# Altium PCB PCB1.PcbDoc
Units mm, origin at the board's own origin, x right, y up, seen from the top; angles counter-clockwise.
Board outline 200.25 x 200.25 mm, 2 copper layers (Top Layer, Bottom Layer); 20 components, 18 nets, 746 pads, 0 vias.
Unrouted connection lines stored in the file: 26.
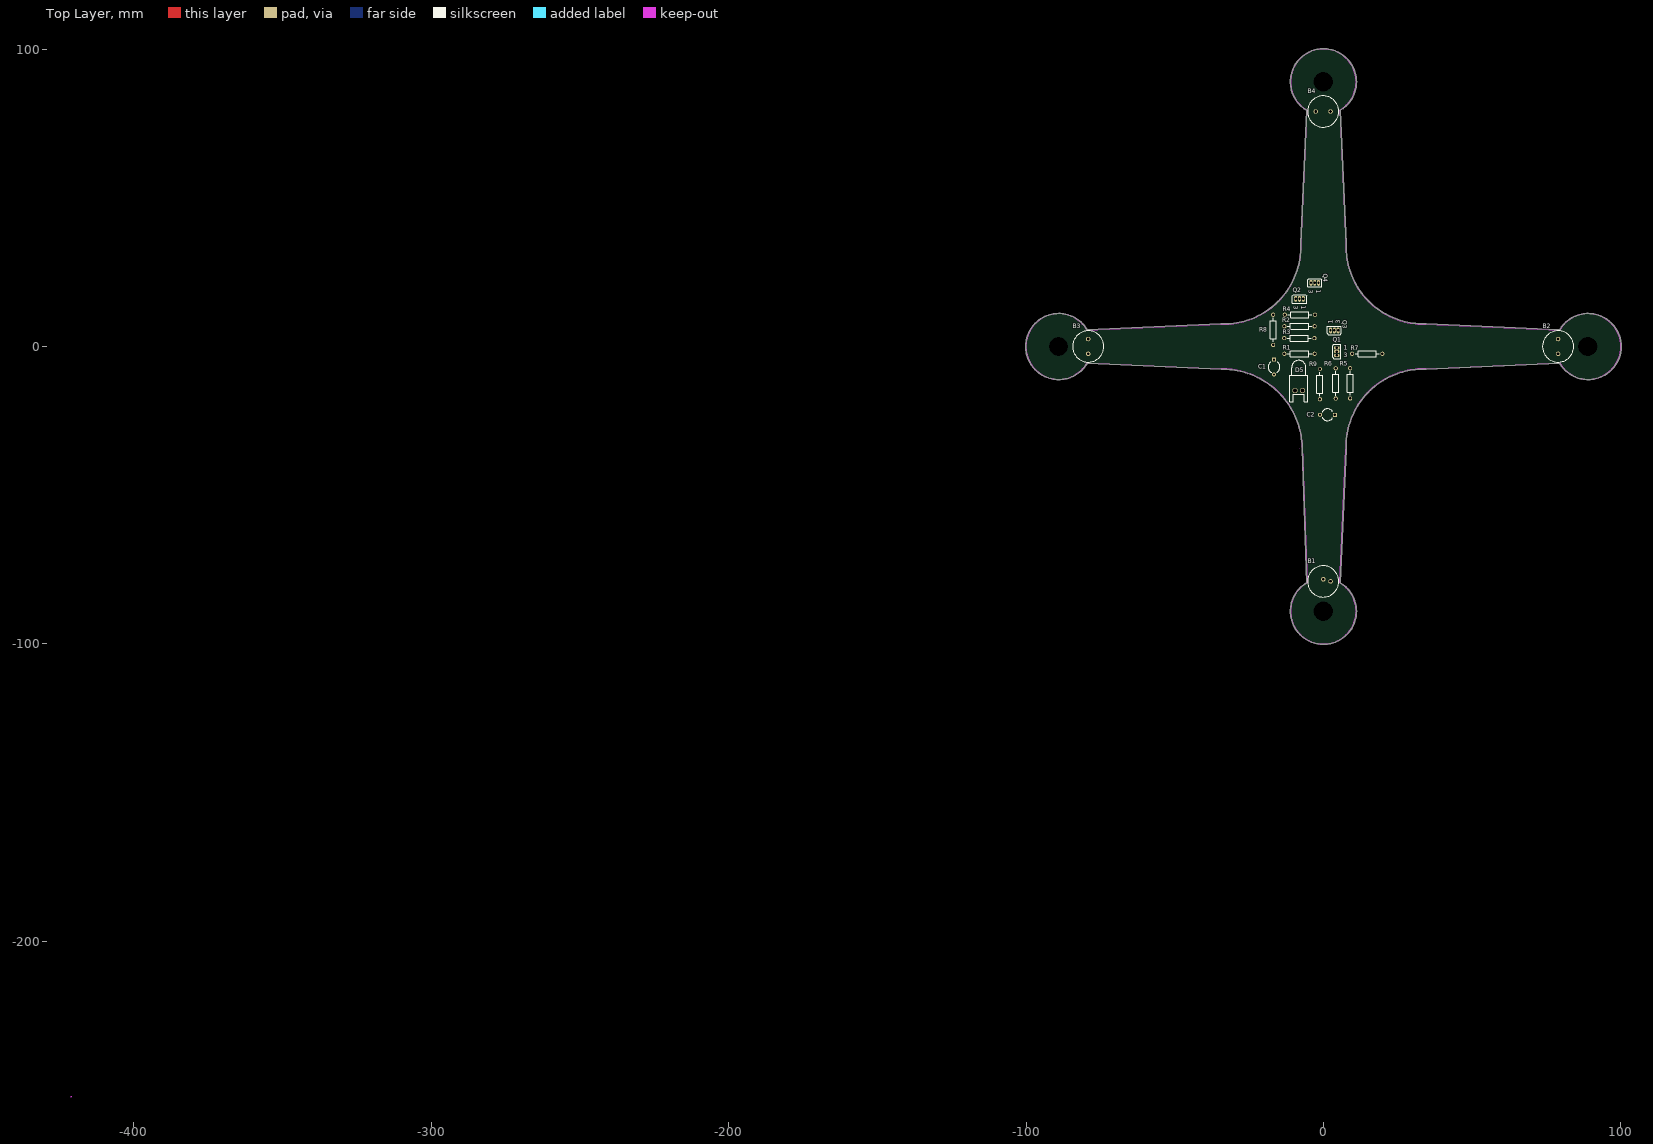
[diagram p0: Top Layer view]
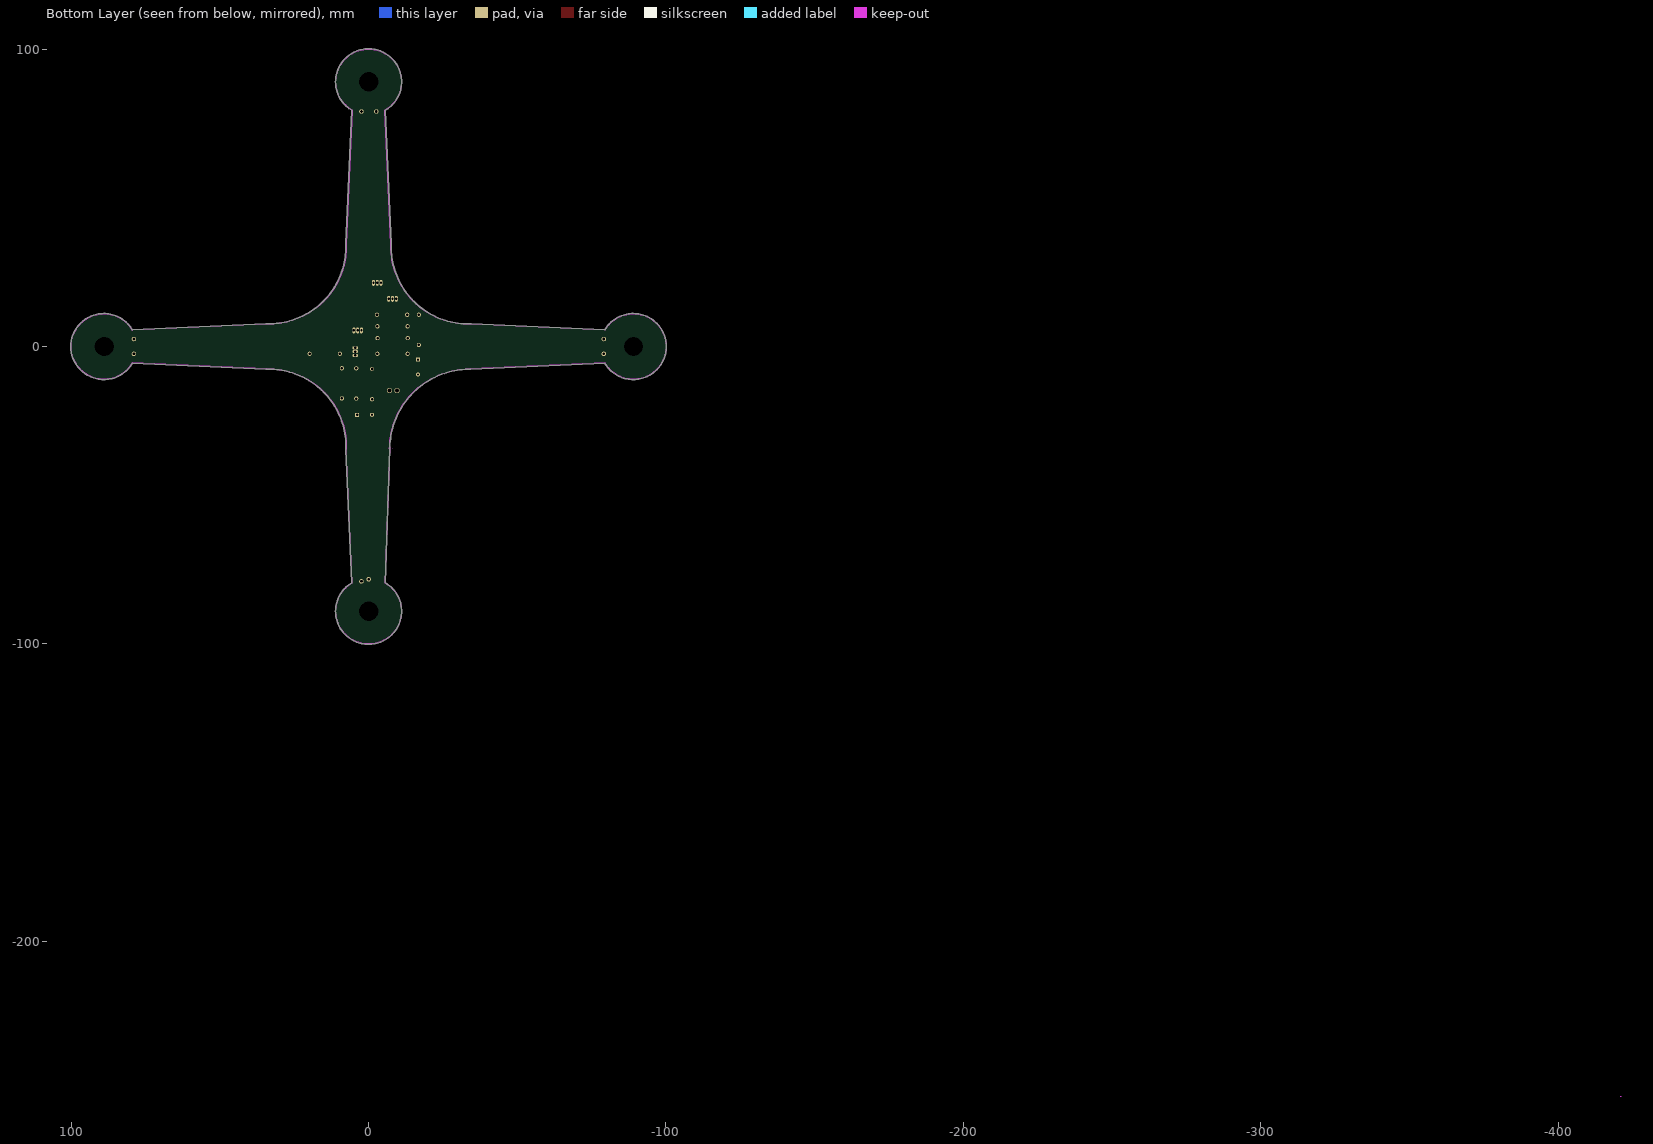
[diagram p1: Bottom Layer view, seen from below]

## Layer stack, top to bottom
Top Layer: signal copper 0.0356
Dielectric: dielectric 0.32, FR-4, Dk 4.8
Bottom Layer: signal copper 0.0356

## Board outline
-34.309,-7.635 ccw(c-34.304,-7.508) -34.256,-7.626 cw(c-34.069,-34.558) -7.153,-33.604 ccw(c-7.035,-33.651) -7.162,-33.655 -7.139,-34.327 ccw(c-7.013,-34.345) -7.141,-34.346 -7.14,-34.365 ccw(c-7.013,-34.364) -7.137,-34.392 -5.63,-79.402 ccw(c0,-89) 11.127,-89 ccw(c0,-89) 5.631,-79.402 7.625,-34.522 ccw(c7.498,-34.517) 7.625,-34.517 ccw(c7.498,-34.517) 7.625,-34.511 cw(c33.633,-33.625) 34.419,-7.615 ccw(c34.474,-7.5) 34.48,-7.627 79.402,-5.631 ccw(c89,0) 100.127,0 ccw(c89,0) 79.402,5.631 34.528,7.625 ccw(c34.476,7.509) 34.472,7.636 cw(c33.639,33.648) 7.627,34.469 cw(c33.639,33.648) 7.627,34.47 7.627,34.469 ccw(c7.5,34.474) 7.627,34.474 ccw(c7.5,34.474) 7.627,34.48 5.631,79.402 ccw(c0,89) 11.127,89 ccw(c0,89) -5.631,79.402 -7.627,34.48 ccw(c-7.5,34.474) -7.627,34.469 cw(c-33.558,33.561) -7.611,33.561 cw(c-33.558,33.561) -34.487,7.631 ccw(c-34.491,7.504) -34.531,7.625 -79.402,5.631 ccw(c-89,0) -79.402,-5.631

## Design rules (kind name [scope] priority, off if disabled: settings)
Clearance Clearance_2 [All] p1: gap=0.254
Clearance Clearance_1 [All] p2: gap=0.254
Clearance [All] p3: gap=0.254
PolygonConnect [All] p1: connectstyle=Relief reliefconductorwidth=0.254 reliefentries=4 polygonreliefangle="90 Angle" airgapwidth=0.254
RoutingLayers [All] p1: top layer_v5=TRUE bottom layer_v5=FALSE
RoutingVias [All] p1: holewidth=0.711 width=1.27 viastyle="Through Hole" minholewidth=0.711 minwidth=1.27 maxholewidth=0.711 maxwidth=1.27
SolderMaskExpansion [All] p1: expansion=0.102
Width [All] p1: maxlimit=0.254 minlimit=0.254 preferedwidth=0.254
27 further rules are at their usual default settings.

## Components (designator, comment, footprint, x,y, rotation, side; value= is the part's Value field where it differs from the comment)
B1 "Motor" RB5-10.5#1 -0.106,-78.968 r180 top
B2 "Motor" RB5-10.5#2 78.894,0.032 r270 top
B3 "Motor" RB5-10.5#2 -79.106,0.032 r270 top
B4 "Motor" RB5-10.5#2 -0.106,79.032 r180 top
C1 "Cap2" CAPR5-4X5 -16.612,-6.883 r270 top
C2 "Cap2" CAPR5-4X5 1.346,-22.936 r180 top
D5 "LED0" LED-0 -8.28,-14.808 r180 top
Q1 "MOSFET-N" E3 4.47,-1.702 r0 top
Q2 "MOSFET-N" E3 -8.052,16.053 r270 top
Q3 "MOSFET-N" E3 3.658,5.436 r90 top
Q4 "MOSFET-N" E3 -2.921,21.438 r270 top
R1 "Res2" AXIAL-0.4 -8.052,-2.438 r0 top
R2 "Res2" AXIAL-0.4 -8.052,6.807 r0 top
R3 "Res2" AXIAL-0.4 -8.103,2.845 r0 top
R4 "Res2" AXIAL-0.4 -7.925,10.693 r0 top
R5 "Res2" AXIAL-0.4 8.966,-12.37 r270 top
R6 "Res2" AXIAL-0.4 4.14,-12.395 r270 top
R7 "Res2" AXIAL-0.4 14.728,-2.431 r0 top
R8 "Res2" AXIAL-0.4 -16.916,5.613 r270 top
R9 "Res2" AXIAL-0.4 -1.168,-12.624 r270 top

## Footprints (in the part's own frame and the unit in brackets; to place one, negate y for a bottom-side part, rotate by r counter-clockwise, add the part's x,y. Pads: shape width x height; smd on the part's side, far side on the other; paste and mask are expansions set on the pad)
AXIAL-0.4 [mm] "Axial Device, Thru-Hole; 2 Leads; 0.4 in Pin Spacing"
  round 1.4 hole 0.85: 1(-5.08,0) 2(5.08,0)
  silkscreen extent -4.06,-1.02 4.06,1.02
CAPR5-4X5 [mm] "Capacitor; 2 Leads"
  rect 1.35x1.35 hole 0.8: 1(-2.5,0)
  round 1.35 hole 0.8: 2(2.5,0)
  silkscreen extent -1.69,-2 1.82,2
E3 [mm] "TO, Flat Index; 3 In-Line, Axial Leads; Body Dia. 4.6mm; Lead Dia. 0.5 mm (max)"
  oval 2x1 hole 0.8: 1(0,1.27) 2(0,0) 3(0,-1.27)
  silkscreen extent -1.41,-2.41 1.41,2.41
LED-0 [mil] "LED; 2 Leads"
  round 70 hole 50: 1(50,0) 2(-50,0)
  silkscreen extent -120,-400 120,150
RB5-10.5#1 [mm] "Capacitor (Radial); 2 Leads"
  round 1.5 hole 0.9: 1(-2.5,0) 2(-0.076,-0.702)
  silkscreen extent -5.25,-5.25 5.25,5.25
RB5-10.5#2 [mm] "Capacitor (Radial); 2 Leads"
  round 1.5 hole 0.9: 1(-2.5,0) 2(2.5,0)
  silkscreen extent -5.25,-5.25 5.25,5.25

## Part data
B1 B2 B3 B4: "Motor, General Kind"
C1 C2: "Capacitor"
D5: "Typical INFRARED GaAs LED"
Q1 Q2 Q3 Q4: "N-Channel MOSFET"
R1 R2 R3 R4 R5 R6 R7 R8 R9: "Resistor"

## Free pads (board coordinates)
  round 0.129 on Keep-Out: 1(-421.136,-252.171) 1(-421.133,-252.174) 1(-421.133,-252.171) 1(-421.133,-252.168) 1(-421.13,-252.171) 1(-421.104,-252.203) 1(-421.104,-252.138) 1(-421.101,-252.206) 1(-421.101,-252.203) 1(-421.101,-252.2) 1(-421.101,-252.141) 1(-421.101,-252.138) 1(-421.101,-252.135) 1(-421.097,-252.203) 1(-421.097,-252.138) 1(-421.071,-252.171) 1(-421.068,-252.174) 1(-421.068,-252.171) 1(-421.068,-252.168) 1(-421.065,-252.171)
  rect 0.039x0.043 on Keep-Out: 1(-421.115,-252.172) 1(-421.115,-252.171) 1(-421.115,-252.17) 1(-421.115,-252.167) 1(-421.115,-252.166) 1(-421.115,-252.172) 1(-421.115,-252.171) 1(-421.115,-252.17) 1(-421.114,-252.175) 1(-421.114,-252.174) 1(-421.112,-252.167) 1(-421.112,-252.166) 1(-421.111,-252.167) 1(-421.111,-252.166) 1(-421.11,-252.167) 1(-421.11,-252.166) 1(-421.109,-252.167) 1(-421.109,-252.166) 1(-421.105,-252.184) 1(-421.105,-252.183) 1(-421.105,-252.163) 1(-421.105,-252.162) 1(-421.105,-252.161) 1(-421.105,-252.16) 1(-421.105,-252.159) 1(-421.105,-252.158) 1(-421.104,-252.184) 1(-421.104,-252.183) 1(-421.104,-252.163) 1(-421.104,-252.162) 1(-421.104,-252.161) 1(-421.104,-252.16) 1(-421.104,-252.159) 1(-421.104,-252.158) 1(-421.103,-252.186) 1(-421.103,-252.185) 1(-421.098,-252.157) 1(-421.098,-252.156) 1(-421.097,-252.183) 1(-421.097,-252.182) 1(-421.097,-252.181) 1(-421.097,-252.18) 1(-421.097,-252.179) 1(-421.097,-252.178) 1(-421.097,-252.158) 1(-421.097,-252.157) 1(-421.096,-252.183) 1(-421.096,-252.182) 1(-421.096,-252.181) 1(-421.096,-252.18) 1(-421.096,-252.179) 1(-421.096,-252.178) 1(-421.096,-252.158) 1(-421.096,-252.157) 1(-421.092,-252.175) 1(-421.092,-252.174) 1(-421.091,-252.175) 1(-421.091,-252.174) 1(-421.09,-252.175) 1(-421.09,-252.174) 1(-421.089,-252.175) 1(-421.089,-252.174) 1(-421.087,-252.167) 1(-421.087,-252.166) 1(-421.086,-252.171) 1(-421.086,-252.17) 1(-421.086,-252.169) 1(-421.086,-252.175) 1(-421.086,-252.174) 1(-421.086,-252.171) 1(-421.086,-252.17) 1(-421.086,-252.169)
  rect 0.043x0.039 on Keep-Out: 1(-421.115,-252.168) 1(-421.115,-252.168) 1(-421.114,-252.167) 1(-421.114,-252.166) 1(-421.113,-252.175) 1(-421.113,-252.174) 1(-421.113,-252.167) 1(-421.113,-252.166) 1(-421.112,-252.175) 1(-421.112,-252.174) 1(-421.111,-252.175) 1(-421.111,-252.174) 1(-421.11,-252.175) 1(-421.11,-252.174) 1(-421.109,-252.175) 1(-421.109,-252.174) 1(-421.108,-252.175) 1(-421.108,-252.174) 1(-421.105,-252.185) 1(-421.105,-252.182) 1(-421.105,-252.181) 1(-421.105,-252.18) 1(-421.105,-252.179) 1(-421.105,-252.157) 1(-421.104,-252.185) 1(-421.104,-252.182) 1(-421.104,-252.181) 1(-421.104,-252.18) 1(-421.104,-252.179) 1(-421.104,-252.157) 1(-421.102,-252.157) 1(-421.102,-252.156) 1(-421.101,-252.186) 1(-421.101,-252.185) 1(-421.101,-252.157) 1(-421.101,-252.156) 1(-421.1,-252.186) 1(-421.1,-252.185) 1(-421.1,-252.157) 1(-421.1,-252.156) 1(-421.099,-252.186) 1(-421.099,-252.185) 1(-421.097,-252.184) 1(-421.097,-252.162) 1(-421.097,-252.161) 1(-421.097,-252.16) 1(-421.097,-252.159) 1(-421.097,-252.156) 1(-421.096,-252.184) 1(-421.096,-252.162) 1(-421.096,-252.161) 1(-421.096,-252.16) 1(-421.096,-252.159) 1(-421.096,-252.156) 1(-421.093,-252.167) 1(-421.093,-252.166) 1(-421.092,-252.167) 1(-421.092,-252.166) 1(-421.091,-252.167) 1(-421.091,-252.166) 1(-421.09,-252.167) 1(-421.09,-252.166) 1(-421.089,-252.167) 1(-421.089,-252.166) 1(-421.088,-252.175) 1(-421.088,-252.174) 1(-421.088,-252.167) 1(-421.088,-252.166) 1(-421.087,-252.175) 1(-421.087,-252.174) 1(-421.086,-252.173) 1(-421.086,-252.173)
  rect 0.079x0.079 on Keep-Out: 1(-421.115,-252.174) 1(-421.115,-252.173) 1(-421.115,-252.169) 1(-421.104,-252.156) 1(-421.103,-252.156) 1(-421.102,-252.185) 1(-421.099,-252.156) 1(-421.098,-252.185) 1(-421.097,-252.185) 1(-421.086,-252.172) 1(-421.086,-252.168) 1(-421.086,-252.167)
  rect 0.016x0.034 on Keep-Out: 1(-421.115,-252.174) 1(-421.115,-252.173) 1(-421.115,-252.169) 1(-421.115,-252.174) 1(-421.115,-252.173) 1(-421.115,-252.169) 1(-421.115,-252.168) 1(-421.114,-252.168) 1(-421.106,-252.173) 1(-421.106,-252.172) 1(-421.106,-252.17) 1(-421.106,-252.165) 1(-421.106,-252.173) 1(-421.106,-252.172) 1(-421.106,-252.17) 1(-421.106,-252.165) 1(-421.105,-252.185) 1(-421.105,-252.183) 1(-421.105,-252.181) 1(-421.105,-252.165) 1(-421.104,-252.185) 1(-421.104,-252.183) 1(-421.104,-252.181) 1(-421.104,-252.165) 1(-421.103,-252.175) 1(-421.102,-252.175) 1(-421.097,-252.16) 1(-421.097,-252.158) 1(-421.097,-252.156) 1(-421.096,-252.16) 1(-421.096,-252.158) 1(-421.096,-252.156) 1(-421.087,-252.173) 1(-421.086,-252.173) 1(-421.086,-252.172) 1(-421.086,-252.169) 1(-421.086,-252.168) 1(-421.086,-252.172) 1(-421.086,-252.169) 1(-421.086,-252.168)
  round 0.036 on Keep-Out: 1(-421.115,-252.172) 1(-421.115,-252.168) 1(-421.114,-252.167) 1(-421.114,-252.167) 1(-421.114,-252.166) 1(-421.114,-252.174) 1(-421.114,-252.173) 1(-421.114,-252.17) 1(-421.114,-252.169) 1(-421.114,-252.169) 1(-421.114,-252.175) 1(-421.113,-252.167) 1(-421.113,-252.167) 1(-421.112,-252.168) 1(-421.112,-252.173) 1(-421.112,-252.173) 1(-421.112,-252.171) 1(-421.112,-252.17) 1(-421.112,-252.169) 1(-421.111,-252.167) 1(-421.11,-252.167) 1(-421.11,-252.175) 1(-421.109,-252.175) 1(-421.108,-252.174) 1(-421.108,-252.169) 1(-421.108,-252.168) 1(-421.106,-252.168) 1(-421.106,-252.172) 1(-421.105,-252.175) 1(-421.105,-252.166) 1(-421.105,-252.185) 1(-421.105,-252.167) 1(-421.105,-252.183) 1(-421.105,-252.181) 1(-421.105,-252.18) 1(-421.105,-252.162) 1(-421.105,-252.161) 1(-421.105,-252.157) 1(-421.104,-252.185) 1(-421.104,-252.185) 1(-421.104,-252.183) 1(-421.104,-252.185) 1(-421.104,-252.163) 1(-421.104,-252.157) 1(-421.103,-252.183) 1(-421.103,-252.159) 1(-421.103,-252.178) 1(-421.103,-252.16) 1(-421.103,-252.157) 1(-421.102,-252.178) 1(-421.102,-252.184) 1(-421.102,-252.182) 1(-421.102,-252.184) 1(-421.101,-252.156) 1(-421.101,-252.184) 1(-421.101,-252.182) 1(-421.101,-252.16) 1(-421.101,-252.164) 1(-421.1,-252.182) 1(-421.1,-252.16) 1(-421.1,-252.157) 1(-421.1,-252.185) 1(-421.099,-252.157) 1(-421.099,-252.16) 1(-421.099,-252.157) 1(-421.099,-252.163) 1(-421.098,-252.184) 1(-421.098,-252.182) 1(-421.098,-252.163) 1(-421.098,-252.182) 1(-421.098,-252.159) 1(-421.098,-252.184) 1(-421.098,-252.178) 1(-421.097,-252.156) 1(-421.097,-252.158) 1(-421.097,-252.157) 1(-421.097,-252.163) 1(-421.097,-252.157) 1(-421.097,-252.184) 1(-421.097,-252.18) 1(-421.097,-252.179) 1(-421.097,-252.161) 1(-421.097,-252.16) 1(-421.097,-252.158) 1(-421.096,-252.157) 1(-421.094,-252.175) 1(-421.093,-252.175) 1(-421.093,-252.173) 1(-421.093,-252.173) 1(-421.093,-252.168) 1(-421.092,-252.167) 1(-421.091,-252.167) 1(-421.091,-252.175) 1(-421.09,-252.175) 1(-421.09,-252.172) 1(-421.09,-252.171) 1(-421.09,-252.17) 1(-421.09,-252.168) 1(-421.089,-252.168) 1(-421.089,-252.173) 1(-421.088,-252.175) 1(-421.088,-252.174) 1(-421.087,-252.167) 1(-421.087,-252.172) 1(-421.087,-252.172) 1(-421.087,-252.171) 1(-421.087,-252.168) 1(-421.087,-252.168) 1(-421.087,-252.175) 1(-421.087,-252.175) 1(-421.087,-252.174) 1(-421.086,-252.174) 1(-421.086,-252.17)
  rect 0.034x0.016 on Keep-Out: 1(-421.115,-252.167) 1(-421.115,-252.166) 1(-421.113,-252.167) 1(-421.113,-252.166) 1(-421.111,-252.167) 1(-421.111,-252.166) 1(-421.104,-252.156) 1(-421.104,-252.156) 1(-421.103,-252.185) 1(-421.103,-252.184) 1(-421.103,-252.156) 1(-421.103,-252.156) 1(-421.102,-252.185) 1(-421.102,-252.185) 1(-421.099,-252.156) 1(-421.099,-252.156) 1(-421.099,-252.185) 1(-421.099,-252.185) 1(-421.098,-252.157) 1(-421.098,-252.156) 1(-421.098,-252.185) 1(-421.098,-252.185) 1(-421.09,-252.175) 1(-421.09,-252.174) 1(-421.088,-252.175) 1(-421.088,-252.174) 1(-421.086,-252.175) 1(-421.086,-252.174)
  rect 0.037x0.02 on Keep-Out: 1(-421.114,-252.167) 1(-421.114,-252.167) 1(-421.102,-252.168) 1(-421.102,-252.167) 1(-421.098,-252.166) 1(-421.098,-252.166) 1(-421.087,-252.175) 1(-421.087,-252.175)
  rect 0.095x0.015 on Keep-Out: 1(-421.113,-252.174) 1(-421.113,-252.173) 1(-421.113,-252.173) 1(-421.113,-252.173) 1(-421.113,-252.173) 1(-421.113,-252.172) 1(-421.113,-252.172) 1(-421.113,-252.172) 1(-421.113,-252.172) 1(-421.113,-252.17) 1(-421.113,-252.17) 1(-421.113,-252.169) 1(-421.113,-252.169) 1(-421.113,-252.169) 1(-421.113,-252.169) 1(-421.113,-252.168) 1(-421.113,-252.168) 1(-421.113,-252.168) 1(-421.109,-252.174) 1(-421.109,-252.173) 1(-421.109,-252.173) 1(-421.109,-252.173) 1(-421.109,-252.173) 1(-421.109,-252.172) 1(-421.109,-252.172) 1(-421.109,-252.172) 1(-421.109,-252.172) 1(-421.109,-252.17) 1(-421.109,-252.17) 1(-421.109,-252.169) 1(-421.109,-252.169) 1(-421.109,-252.169) 1(-421.109,-252.169) 1(-421.109,-252.168) 1(-421.109,-252.168) 1(-421.109,-252.168) 1(-421.092,-252.174) 1(-421.092,-252.173) 1(-421.092,-252.173) 1(-421.092,-252.173) 1(-421.092,-252.173) 1(-421.092,-252.172) 1(-421.092,-252.172) 1(-421.092,-252.172) 1(-421.092,-252.172) 1(-421.092,-252.17) 1(-421.092,-252.17) 1(-421.092,-252.169) 1(-421.092,-252.169) 1(-421.092,-252.169) 1(-421.092,-252.169) 1(-421.092,-252.168) 1(-421.092,-252.168) 1(-421.092,-252.168) 1(-421.088,-252.174) 1(-421.088,-252.173) 1(-421.088,-252.173) 1(-421.088,-252.173) 1(-421.088,-252.173) 1(-421.088,-252.172) 1(-421.088,-252.172) 1(-421.088,-252.172) 1(-421.088,-252.172) 1(-421.088,-252.17) 1(-421.088,-252.17) 1(-421.088,-252.169) 1(-421.088,-252.169) 1(-421.088,-252.169) 1(-421.088,-252.169) 1(-421.088,-252.168) 1(-421.088,-252.168) 1(-421.088,-252.168)
  rect 0.095x0.142 on Keep-Out: 1(-421.113,-252.171) 1(-421.109,-252.171) 1(-421.092,-252.171) 1(-421.088,-252.171)
  rect 0.024x0.028 on Keep-Out: 1(-421.113,-252.173) 1(-421.11,-252.173) 1(-421.091,-252.169) 1(-421.088,-252.169)
  rect 0.01x0.053 on Keep-Out: 1(-421.113,-252.169) 1(-421.111,-252.169) 1(-421.1,-252.165) 1(-421.098,-252.165) 1(-421.091,-252.172) 1(-421.089,-252.172)
  rect 0.034x0.122 on Keep-Out: 1(-421.112,-252.171) 1(-421.11,-252.171) 1(-421.091,-252.171) 1(-421.089,-252.171)
  rect 0.012x0.083 on Keep-Out: 1(-421.112,-252.169) 1(-421.099,-252.164) 1(-421.089,-252.172)
  rect 0.029x0.067 on Keep-Out: 1(-421.112,-252.168) 1(-421.111,-252.168) 1(-421.1,-252.165) 1(-421.099,-252.167) 1(-421.099,-252.165) 1(-421.098,-252.172) 1(-421.098,-252.167) 1(-421.097,-252.172) 1(-421.09,-252.173) 1(-421.089,-252.173)
  rect 0.036x0.036 on Keep-Out: 1(-421.111,-252.171) 1(-421.111,-252.17) 1(-421.111,-252.171) 1(-421.111,-252.17) 1(-421.108,-252.171) 1(-421.108,-252.17) 1(-421.101,-252.178) 1(-421.101,-252.163) 1(-421.101,-252.181) 1(-421.101,-252.181) 1(-421.101,-252.161) 1(-421.101,-252.16) 1(-421.1,-252.181) 1(-421.1,-252.181) 1(-421.1,-252.161) 1(-421.1,-252.16) 1(-421.1,-252.178) 1(-421.1,-252.163) 1(-421.093,-252.171) 1(-421.093,-252.17) 1(-421.091,-252.171) 1(-421.091,-252.17) 1(-421.09,-252.171) 1(-421.09,-252.17)
  round 0 on Keep-Out: 1(-421.107,-252.176) 1(-421.107,-252.175) 1(-421.107,-252.174) 1(-421.107,-252.173) 1(-421.107,-252.172) 1(-421.107,-252.171) 1(-421.107,-252.17) 1(-421.107,-252.169) 1(-421.107,-252.168) 1(-421.107,-252.167) 1(-421.107,-252.166) 1(-421.107,-252.165) 1(-421.102,-252.17) 1(-421.102,-252.169) 1(-421.101,-252.176) 1(-421.101,-252.175) 1(-421.101,-252.174) 1(-421.101,-252.173) 1(-421.101,-252.172) 1(-421.101,-252.171) 1(-421.101,-252.17) 1(-421.101,-252.169) 1(-421.101,-252.168) 1(-421.101,-252.167) 1(-421.101,-252.166) 1(-421.101,-252.165)
  rect 0.02x0.02 on Keep-Out: 1(-421.107,-252.176) 1(-421.107,-252.175) 1(-421.107,-252.174) 1(-421.107,-252.173) 1(-421.107,-252.172) 1(-421.107,-252.171) 1(-421.107,-252.17) 1(-421.107,-252.169) 1(-421.107,-252.168) 1(-421.107,-252.167) 1(-421.107,-252.166) 1(-421.107,-252.165) 1(-421.102,-252.17) 1(-421.102,-252.169) 1(-421.101,-252.176) 1(-421.101,-252.175) 1(-421.101,-252.174) 1(-421.101,-252.173) 1(-421.101,-252.172) 1(-421.101,-252.171) 1(-421.101,-252.17) 1(-421.101,-252.169) 1(-421.101,-252.168) 1(-421.101,-252.167) 1(-421.101,-252.166) 1(-421.101,-252.165)
  rect 0.02x0.037 on Keep-Out: 1(-421.105,-252.173) 1(-421.105,-252.172) 1(-421.105,-252.17) 1(-421.105,-252.184) 1(-421.105,-252.174) 1(-421.104,-252.173) 1(-421.104,-252.172) 1(-421.104,-252.17) 1(-421.104,-252.184) 1(-421.104,-252.174) 1(-421.104,-252.175) 1(-421.103,-252.175) 1(-421.097,-252.157) 1(-421.096,-252.157)
  round 0.052 on Keep-Out: 1(-421.103,-252.175) 1(-421.103,-252.174) 1(-421.103,-252.173) 1(-421.103,-252.172) 1(-421.103,-252.171) 1(-421.103,-252.171) 1(-421.103,-252.17) 1(-421.103,-252.169) 1(-421.103,-252.168) 1(-421.103,-252.167) 1(-421.095,-252.175) 1(-421.095,-252.174) 1(-421.095,-252.173) 1(-421.095,-252.172) 1(-421.095,-252.171) 1(-421.095,-252.171) 1(-421.095,-252.17) 1(-421.095,-252.169) 1(-421.095,-252.168) 1(-421.095,-252.167)
  rect 0.015x0.095 on Keep-Out: 1(-421.103,-252.183) 1(-421.103,-252.179) 1(-421.103,-252.162) 1(-421.103,-252.158) 1(-421.103,-252.183) 1(-421.103,-252.179) 1(-421.103,-252.162) 1(-421.103,-252.158) 1(-421.103,-252.183) 1(-421.103,-252.179) 1(-421.103,-252.162) 1(-421.103,-252.158) 1(-421.103,-252.183) 1(-421.103,-252.179) 1(-421.103,-252.162) 1(-421.103,-252.158) 1(-421.102,-252.183) 1(-421.102,-252.179) 1(-421.102,-252.162) 1(-421.102,-252.158) 1(-421.102,-252.183) 1(-421.102,-252.179) 1(-421.102,-252.162) 1(-421.102,-252.158) 1(-421.102,-252.183) 1(-421.102,-252.179) 1(-421.102,-252.162) 1(-421.102,-252.158) 1(-421.102,-252.183) 1(-421.102,-252.179) 1(-421.102,-252.162) 1(-421.102,-252.158) 1(-421.101,-252.183) 1(-421.101,-252.179) 1(-421.101,-252.162) 1(-421.101,-252.158) 1(-421.1,-252.183) 1(-421.1,-252.179) 1(-421.1,-252.162) 1(-421.1,-252.158) 1(-421.099,-252.183) 1(-421.099,-252.179) 1(-421.099,-252.162) 1(-421.099,-252.158) 1(-421.099,-252.183) 1(-421.099,-252.179) 1(-421.099,-252.162) 1(-421.099,-252.158) 1(-421.099,-252.183) 1(-421.099,-252.179) 1(-421.099,-252.162) 1(-421.099,-252.158) 1(-421.099,-252.183) 1(-421.099,-252.179) 1(-421.099,-252.162) 1(-421.099,-252.158) 1(-421.098,-252.183) 1(-421.098,-252.179) 1(-421.098,-252.162) 1(-421.098,-252.158) 1(-421.098,-252.183) 1(-421.098,-252.179) 1(-421.098,-252.162) 1(-421.098,-252.158) 1(-421.098,-252.183) 1(-421.098,-252.179) 1(-421.098,-252.162) 1(-421.098,-252.158) 1(-421.098,-252.183) 1(-421.098,-252.179) 1(-421.098,-252.162) 1(-421.098,-252.158)
  rect 0.067x0.029 on Keep-Out: 1(-421.103,-252.182) 1(-421.103,-252.181) 1(-421.098,-252.159) 1(-421.098,-252.161)
  rect 0.028x0.024 on Keep-Out: 1(-421.103,-252.161) 1(-421.103,-252.158) 1(-421.099,-252.183) 1(-421.099,-252.18)
  rect 0.083x0.012 on Keep-Out: 1(-421.102,-252.182) 1(-421.099,-252.159)
  rect 0.053x0.01 on Keep-Out: 1(-421.102,-252.183) 1(-421.102,-252.181) 1(-421.099,-252.161) 1(-421.099,-252.159)
  rect 0.142x0.095 on Keep-Out: 1(-421.101,-252.183) 1(-421.101,-252.179) 1(-421.101,-252.162) 1(-421.101,-252.158)
  rect 0.122x0.034 on Keep-Out: 1(-421.101,-252.182) 1(-421.101,-252.18) 1(-421.101,-252.161) 1(-421.101,-252.159)
  round 0.055 on Keep-Out: 1(-421.1,-252.173) 1(-421.1,-252.172) 1(-421.1,-252.171) 1(-421.1,-252.17) 1(-421.1,-252.169) 1(-421.1,-252.168) 1(-421.1,-252.167) 1(-421.094,-252.173) 1(-421.094,-252.172) 1(-421.094,-252.171) 1(-421.094,-252.17) 1(-421.094,-252.169) 1(-421.094,-252.168) 1(-421.094,-252.167) 1(-421.094,-252.166)
  rect 0.055x0.055 on Keep-Out: 1(-421.1,-252.166)
  rect 0.034x0.073 on Keep-Out: 1(-421.099,-252.169) 1(-421.099,-252.169) 1(-421.098,-252.169) 1(-421.098,-252.169) 1(-421.097,-252.169) 1(-421.097,-252.169)
  rect 0.126x0.073 on Keep-Out: 1(-421.098,-252.171) 1(-421.098,-252.171)
  rect 0.024x0.024 on Keep-Out: 1(-421.096,-252.166) 1(-421.096,-252.165)
  round 1.524 hole 6.5: 1(-89.106,0.032) 5(-0.106,89.032) 6(-0.106,-88.968) 7(88.894,0.032)

## Nets (pads, with @x,y where several pads share a name; then routed paths per layer and width w, separated by ;. In a path a pad name is that pad's centre, name@x,y a point inside that pad or via, vN(x,y) a via of type N, cw(c..) or ccw(c..) an arc to the next point about the centre after c; other vN are vias at no path point)
/CE: C1.1 C2.1 Q1.3 Q2.3 Q3.3 Q4.3 R1.1 R2.1 R3.1 R4.1 R5.2 R6.2 R7.2 R8.1
BAT: C1.2
EN2: C2.2 R9.2
ILIM: R6.1
IN: B1.1 B2.1 B3.1 B4.1
ISET: R7.1
MOTO1: Q1.2 R1.2
MOTO2: Q2.2 R2.2
MOTO3: Q3.2 R3.2
MOTO4: Q4.2 R4.2
NetB1_2: B1.2 Q1.1
NetB2_2: B2.2 Q2.1
NetB3_2: B3.2 Q3.1
NetB4_2: B4.2 Q4.1
NetD5_1: D5.1 R9.1
NetD5_2: D5.2
NetR8_2: R8.2
TMR: R5.1

## Keep-outs
Keep-Out Layer:
  drawing of 10037 lines, arcs and shapes, not listed

## Text inside footprints (layer, text, board x,y; h text height)
Q1: Top Overlay "1" at 6.745,-1.147 h1.5; Top Overlay "3" at 6.745,-3.665 h1.5
Q2: Top Overlay "1" at -7.497,13.778 h1.5 r270; Top Overlay "3" at -10.015,13.778 h1.5 r270
Q3: Top Overlay "1" at 3.103,7.711 h1.5 r90; Top Overlay "3" at 5.621,7.711 h1.5 r90
Q4: Top Overlay "1" at -2.366,19.163 h1.5 r270; Top Overlay "3" at -4.884,19.163 h1.5 r270